# Altium PCB doamEsp.PcbDoc
Units mil, origin at the board's own origin, x right, y up, seen from the top; angles counter-clockwise.
Board outline 3325.07 x 2924.95 mil, 2 copper layers (Top Layer, Bottom Layer); 20 components, 19 nets, 88 pads, 0 vias.
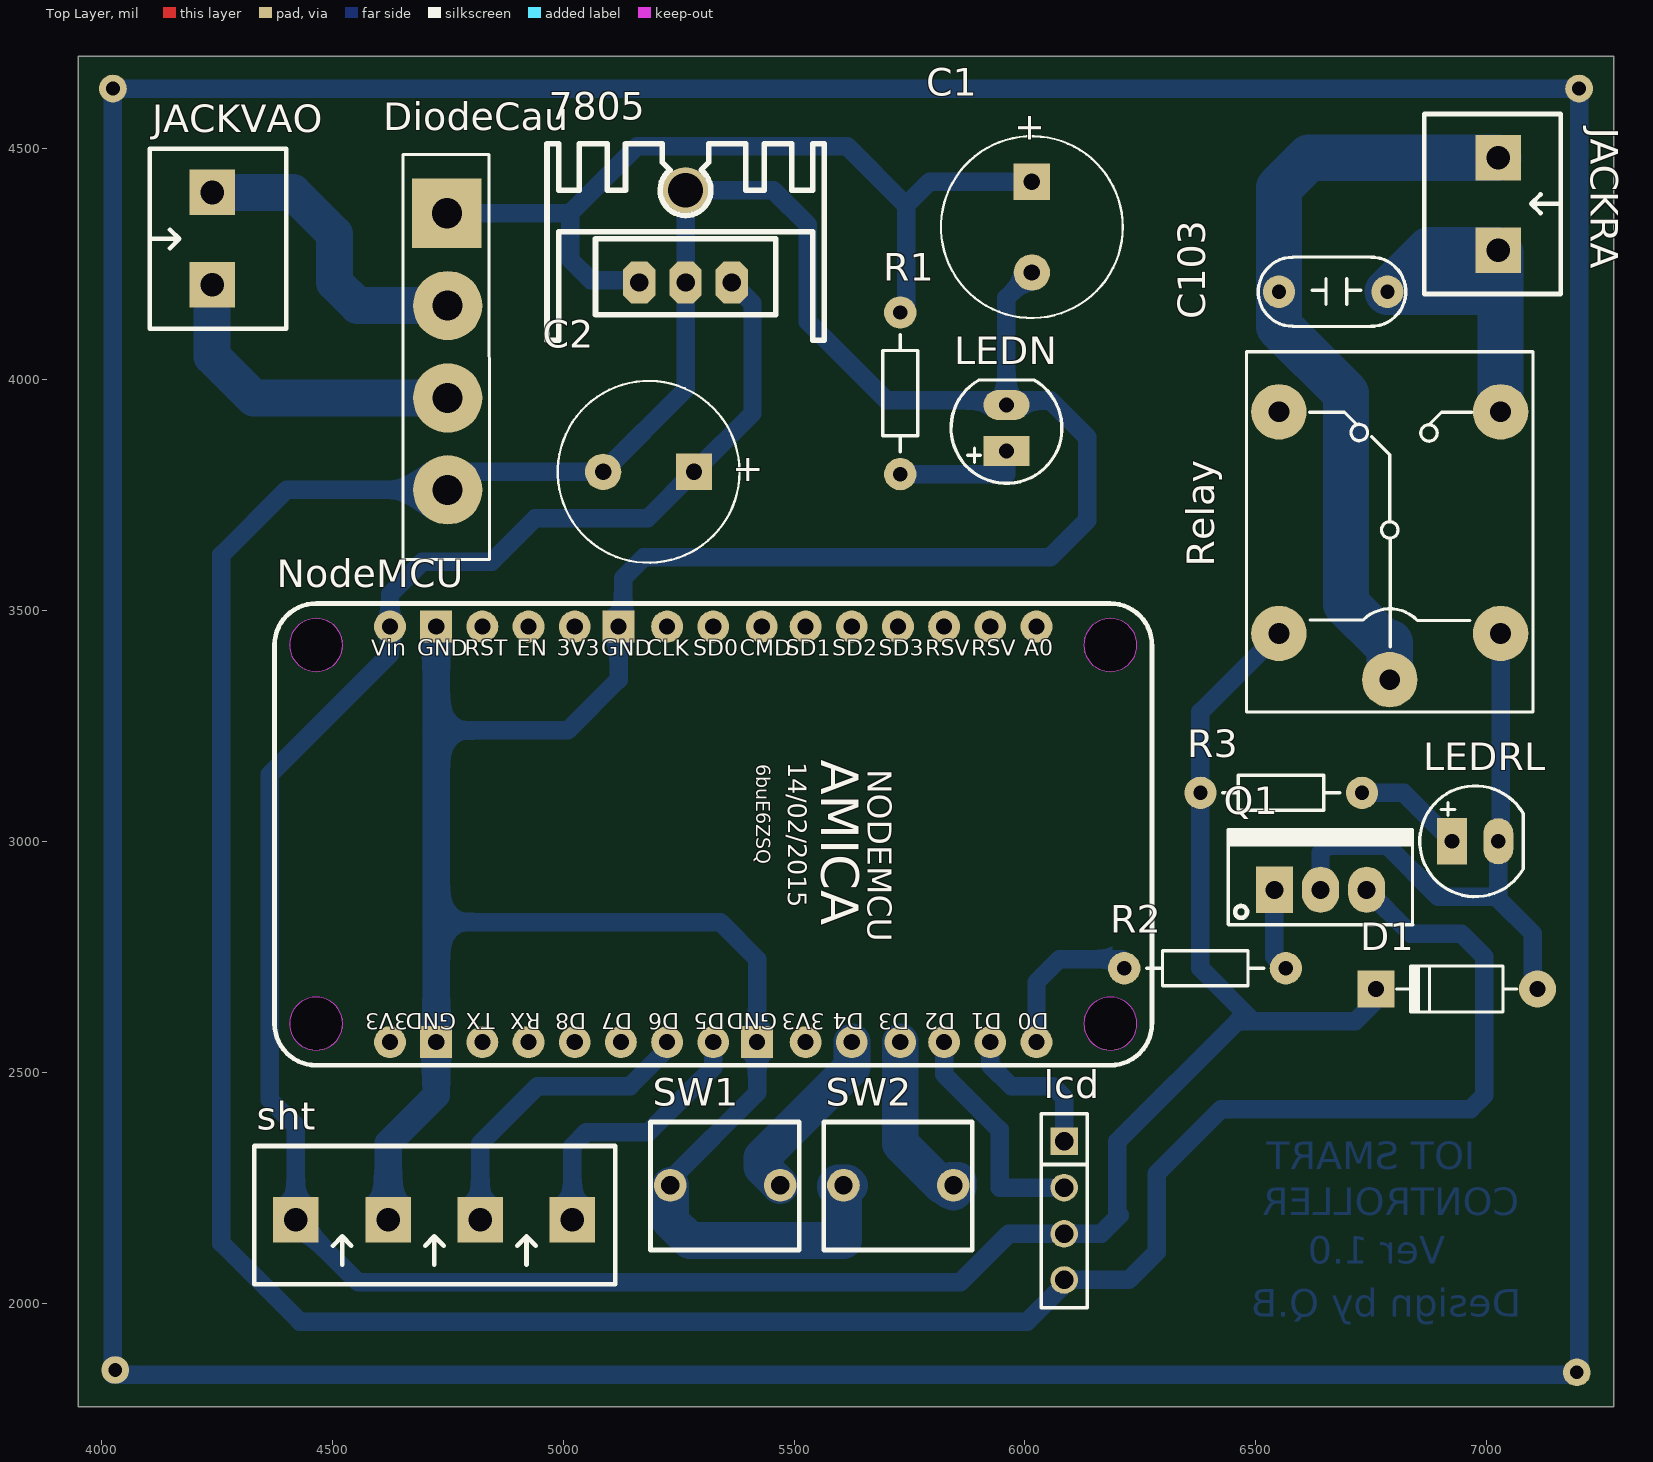
[diagram p0: Top Layer view]
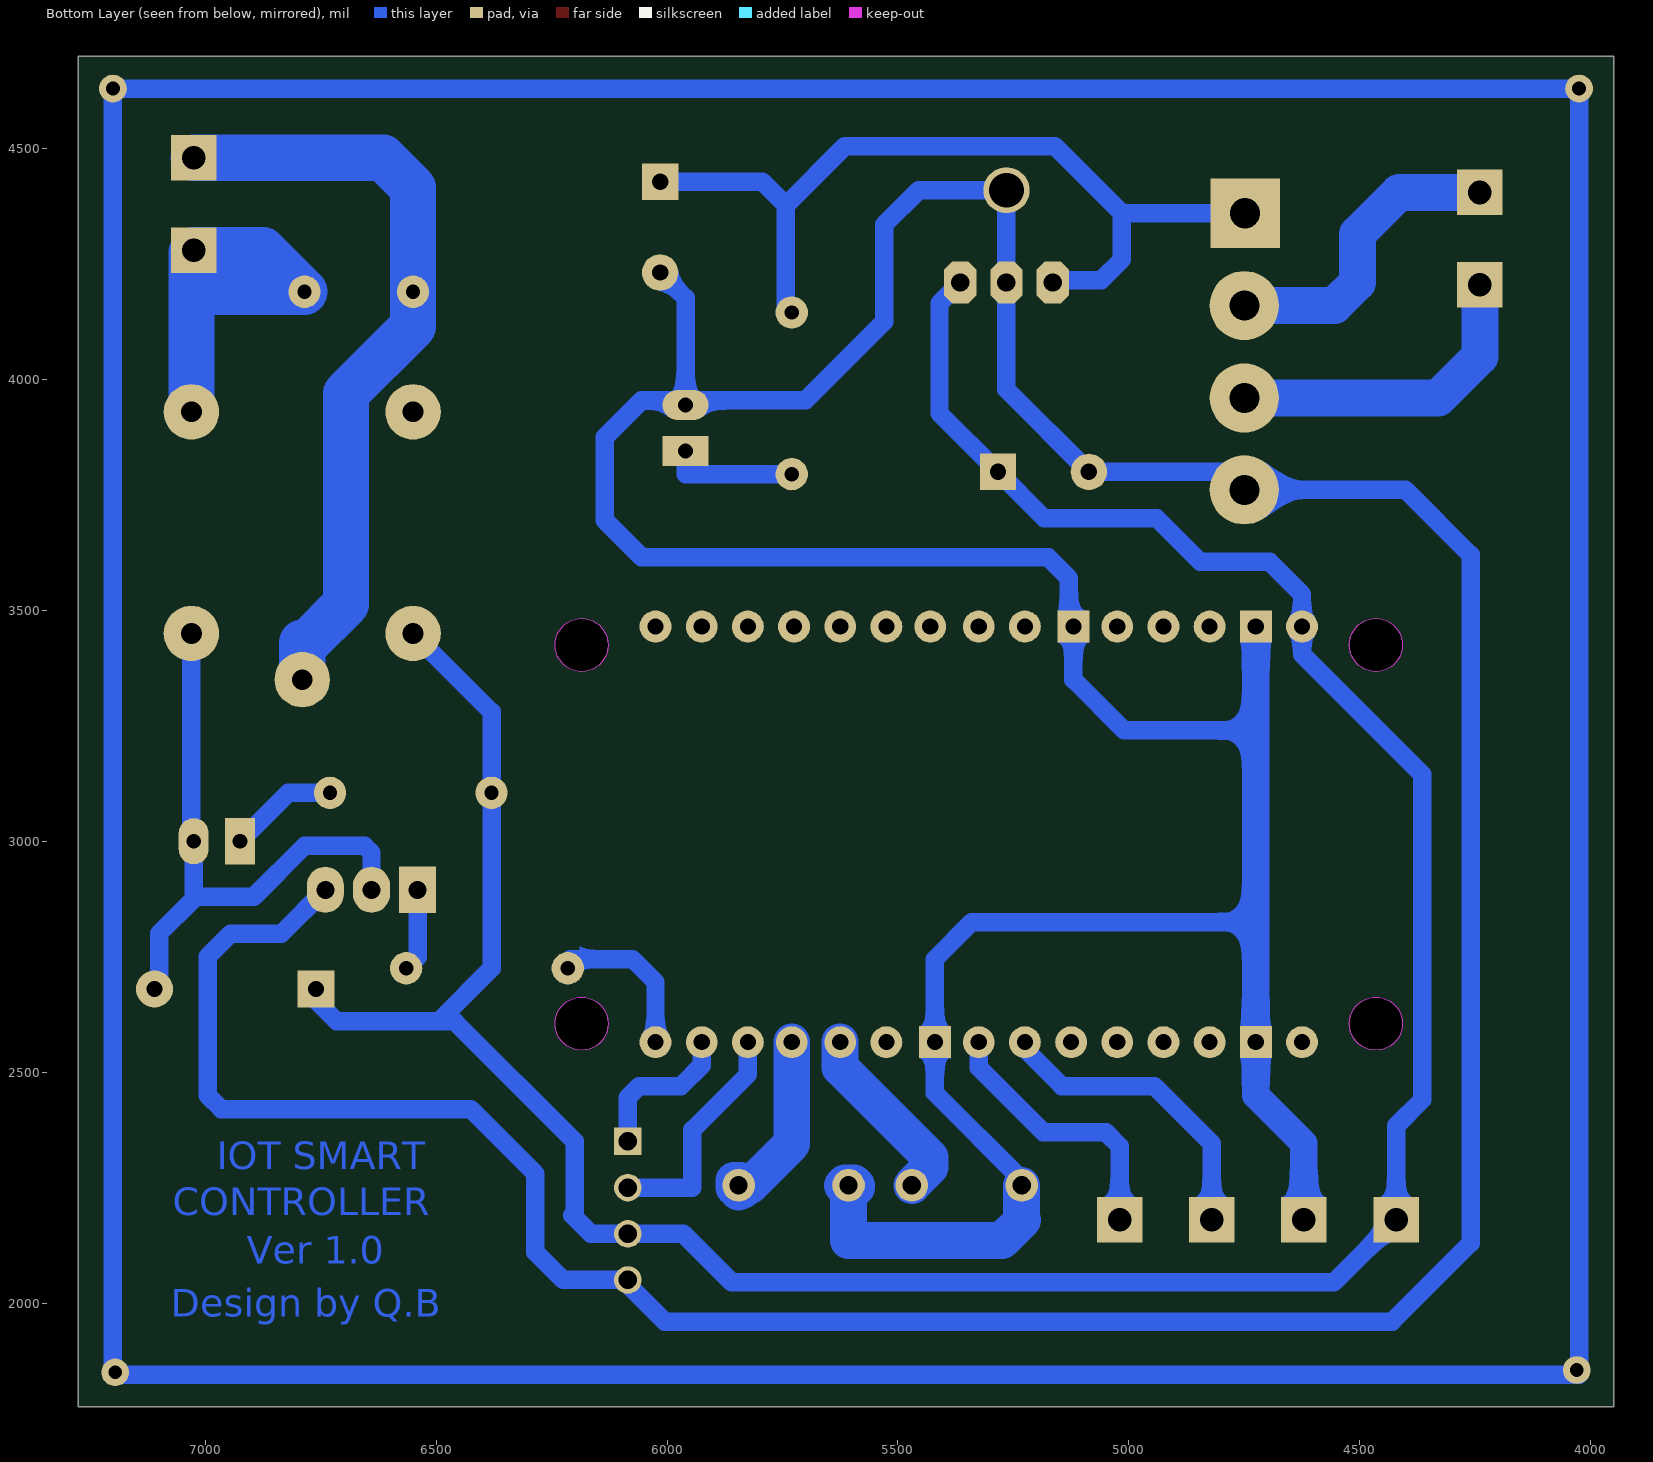
[diagram p1: Bottom Layer view, seen from below]
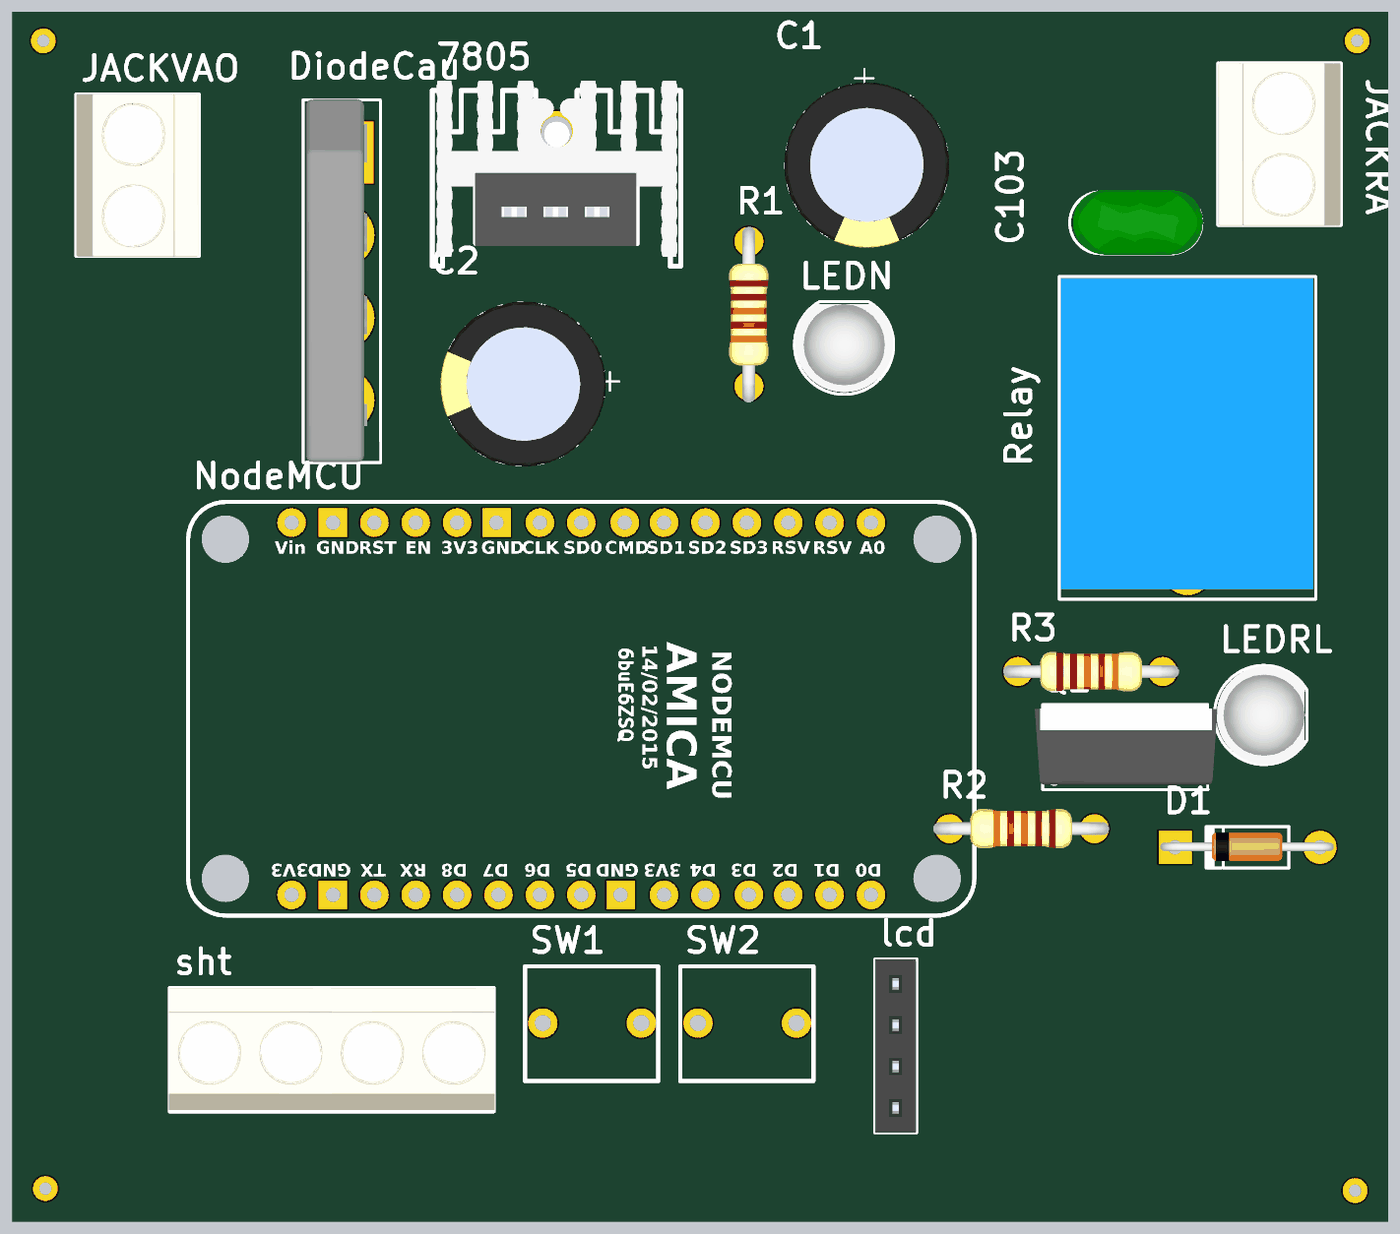
[diagram p2: 3D render of the assembled board from above, using the file's embedded part models]

## Layer stack, top to bottom
Top Solder: solder mask 0.4, Solder Resist, Dk 3.5
Top Layer: signal copper 1.4
Dielectric 1: dielectric 12.6, FR-4, Dk 4.8
Bottom Layer: signal copper 1.4
Bottom Solder: solder mask 0.4, Solder Resist, Dk 3.5

## Board outline
3949.94,1774.99 7275.01,1774.99 7275.01,4699.94 3949.94,4699.94

## Design rules (kind name [scope] priority, off if disabled: settings)
Clearance [All] p1: gap=10 ignorepadtopadclearanceinfootprint=FALSE except(0: Arc-Hole Track-Hole SMDPad-Hole THPad-Hole Via-Hole Fill-Hole Poly-Hole Region-Hole Text-Hole)
PolygonConnect [All] p1: connectstyle=Relief reliefconductorwidth=10 reliefentries=4 polygonreliefangle="90 Angle" airgapwidth=10
RoutingVias [All] p1: holewidth=28 width=50 viastyle="Through Hole" minholewidth=28 minwidth=50 maxholewidth=28 maxwidth=50
SolderMaskExpansion [All] p1: expansion=4
Width [All] p1: maxlimit=100 minlimit=40 preferedwidth=80
30 further rules are at their usual default settings.

## Components (designator, comment, footprint, x,y, rotation, side; value= is the part's Value field where it differs from the comment)
7805 "LM7805" QTO-220H3 5165,4210 r0 top
C1 "2200UF 16V" CA-ALU-10 6015,4330 r270 top value=104
C2 "2200UF 16V" CA-ALU-10 5185,3800 r180 top value=104
C103 "2KV" CN2.5 6675,4190 r180 top value=33pF
D1 "1N4007" D1A 7110,2680 r0 top
DiodeCau "Diode Brideg" "DIO-Bri 5A" 4750,4360 r270 top value="Cau 1A"
JACKRA "KF2" KF2-5.08 7025,4380 r270 top
JACKVAO "KF2" KF2-5.08 4240,4305 r90 top
lcd "JP4" JP4-C1T 6085,2350 r270 top
LEDN "LED" LED-5-RED 5960,3845 r90 top value="LED 3 ly Single Colour"
LEDRL "LED" LED-5-RED 6925,3000 r0 top value="LED 3 ly Single Colour"
NodeMCU "NodeMCU V1.0 ESP-12E" "NodeMCU V1.0 ESP-12E" 6271,3516 r270 top
Q1 "H1061" QTO-220 6540,2895 r0 top value=TIP41
R1 "1,2K" R1/4W 5730,3795 r90 top value="R1/4W - 1K"
R2 "1k" R1/4W 6215,2725 r0 top value="R1/4W - 1K"
R3 "1K" R1/4W 6730,3105 r180 top value="R1/4W - 1K"
Relay "5V" "RELAY 5" 6790,3675 r90 top value="Relay SPDT, 10A, 12V"
sht "KF4" KF4-5.08 4421,2180 r0 top (schematic designator SHT)
SW1 "SW" SW-2P-S 5470,2155 r180 top value="SW chip 2 pin"
SW2 "SW" SW-2P-S 5845,2155 r180 top value="SW chip 2 pin"

## Footprints (in the part's own frame and the unit in brackets; to place one, negate y for a bottom-side part, rotate by r counter-clockwise, add the part's x,y. Pads: shape width x height; smd on the part's side, far side on the other; paste and mask are expansions set on the pad)
CA-ALU-10 [mm] "Polarized capacitors, Aluminum Electrolytic Capacitors, 2-Leads, Body 10x20x5x0.6"
  rect 2x2 hole 0.9: 1(-2.5,0)
  round 2 hole 0.9: 2(2.5,0)
  silkscreen extent -5,-5 5,5, body extent -5.08,-5.08 5.08,5.08, height 20.52
CN2.5 [mil] "Tu pin to pin 250mil"
  round 70 hole 31: 1(-110,0) 2(125,0)
  silkscreen extent -150,-75 170,75, body extent -152,-80 162,77, height 539
D1A [mil] "Diode 1A, W 100mil, L 350mil"
  round 80 hole 35: 1(0,0)
  rect 80x80 hole 35: 2(-350,0)
  silkscreen extent -305,-50 -45,50, body extent -386,-33 34,36, height 84
"DIO-Bri 5A" [mil] "Brigde 5A"
  rect 150x150 hole 65: 1(0,-2)
  round 150 hole 65: 2(200,0) 3(400,0) 4(599,0)
  silkscreen extent -127,-97 750,90, body extent -129,-90 749,58, height 937
JP4-C1T [mm] "4 row, straight, gold plating"
  rect 1.52x1.52 hole 1.02: 1(0,0)
  round 1.52 hole 1.02: 2(2.54,0) 3(5.08,0) 4(7.62,0)
  silkscreen extent -1.52,-1.27 9.14,1.27, body extent -1.52,-1.25 9.14,1.25, height 8.51
KF2-5.08 [mm]
  rect 2.5x2.5 hole 1.3: 1(-2.54,0) 2(2.54,0)
  silkscreen extent -4.95,-4.08 4.95,3.43, body extent -5,-4.07 5,3.43, height 10
KF4-5.08 [mm]
  rect 2.5x2.5 hole 1.3: 1(0,0) 2(5.08,0) 3(10.147,0) 4(15.215,0)
  silkscreen extent -2.29,-3.53 17.58,4.06, body extent -2.36,-3.43 17.64,4.07, height 10
LED-5-RED [mil] "LED 2 PIN, 5 ly , Only colour,pin to pin 100mil"
  rect 65x100 hole 32: 1(0,0)
  oval 65x100 hole 32: 2(100,0)
  silkscreen extent -70,-120 154,120, body extent -65,-119 149,118, height 339
"NodeMCU V1.0 ESP-12E" [mil]
  round 115 hole 115 unplated paste-300 mask-300: 0(91,-86) 0(91,-1806) 0(911,-86) 0(911,-1806)
  round 69 hole 35: 3V3(51,-1246) 3V3(951,-746) 3V3(951,-1646) A0(51,-246) CLK(51,-1046) CMD(51,-841) D0(951,-246) D1(951,-346) D2(951,-446) D3(951,-541) D4(951,-646) D5(951,-946) D6(951,-1046) D7(951,-1146) D8(951,-1246) EN(51,-1346) RST(51,-1446) RSV(51,-346) RSV(51,-446) RX(951,-1346) SD0(51,-946) SD1(51,-746) SD2(51,-646) SD3(51,-546) TX(951,-1446) VIN(51,-1646)
  rect 69x69 hole 35: GND(51,-1151) GND(51,-1546) GND(951,-851) GND(951,-1546)
  Keep-Out Layer circle w2: c911,-1806 r57.5
  Keep-Out Layer circle w2: c91,-1806 r57.5
  Keep-Out Layer circle w2: c911,-86 r57.5
  Keep-Out Layer circle w2: c91,-86 r57.5
  silkscreen extent 1,-1896 1001,4
QTO-220 [mil] "TO-220 - 1-2-3"
  rect 80x100 hole 39: 1(0,0)
  oval 80x100 hole 39: 2(100,0) 3(200,0)
  silkscreen extent -100,-76 300,130, body extent -119,-64 322,121, height 755
QTO-220H3 [mil] "TO-220 1-2-3"
  oct 70x90 hole 40: 1(0,0) 2(100,0) 3(200,0)
  round 100 hole 75: 2(100,200)
  silkscreen extent -200,-125 400,300, body extent -190,-102 392,323, height 984
R1/4W [mil] "R 1/4W, 2 Pin, 350mil"
  round 70 hole 31: 1(0,0) 2(350,0)
  silkscreen extent 48,-38 302,38, body extent -40,-47 386,47, height 111
"RELAY 5" [mil] "Reley DPDT, 8 pin, 1A, W400mil, L800mil,H 300mil"
  round 120 hole 45: 1(-325,0) 2(255,240) 3(255,-240) 4(-225,-240) 5(-225,240)
  silkscreen extent -395,-310 385,310, body extent -371,-304 381,306, height 602
SW-2P-S [mm]
  round 1.8 hole 1: 1(0,-2.54) 2(6.045,-2.54)
  silkscreen extent -1.04,-6.02 7.14,1.02

## Part data
7805: "TO-220", Text Field1=70, Text Field2=30
C1 C2: library part CN-ALU-DIP, "Capacitor (Semiconductor SIM Model)", LatestRevisionDate=17-Jul-2002, LatestRevisionNote="Re-released for DXP Platform.", PackageReference=C1206, Publisher="Altium Limited"
C103: library part CN
D1: library part D1A, "Diode 1A"
DiodeCau: library part "DIODE BRIGDE", "Convert AC to DC voltage, 4 pin", ="Cau 5A"
JACKRA JACKVAO: Manufacturer="Würth Elektronik eiSos GmbH", partNo=691103110002, ComponentLink1 Description=Manufacturer, ComponentLink1URL=http://www.we-online.com, ComponentLink2 Description=Datasheet, ComponentLink2URL=http://katalog.we-online.de/em/datasheet/6911031100xx.pdf, Created by="Karrer Zheng", Created Date="29 October 2013", NoPins=2
lcd: "WR-PHD 2.54 mm Angled Socket Header", Manufacturer="Würth Elektronik eiSos GmbH", partNo=613004143121, ComponentLink1 Description=Manufacturer, ComponentLink1URL=http://www.we-online.com, ComponentLink2 Description=Datasheet, ComponentLink2URL=http://katalog.we-online.de/em/datasheet/6130xx143121.pdf, Created by="Karrer Zheng", Created Date="29 March 2013", NoPins=04
LEDN LEDRL: "LED Single colour Green and Red"
NodeMCU: "NodeMCU V1.0 ESP8266 (ESP-12E)"
Q1: library part NPN_BCE, "P 1W, BCE", =H1061
R1 R2 R3: library part R1/4W, "Resistor 1/4W"
Relay: library part "Relay 5", "Relay SPDT,10A - 12VDC 5 Pin", ="Relay SPDT, 10A, 24V"
sht: Manufacturer="Würth Elektronik eiSos GmbH", partNo=691133710004, ComponentLink1 Description=Manufacturer, ComponentLink1 URL=http://www.we-online.com, ComponentLink2 Description=Datasheet, ComponentLink2 URL=http://katalog.we-online.de/em/datasheet/6911337100xx.pdf, Created by="Baojun Chen", Created Date=4-Aug-15, NoPins=4
SW1 SW2: library part SW2, "Switch button 2 pin"

## Free pads (board coordinates)
  round 60 hole 30: 2(4030,1855) 4(4025,4630) 5(7200,4630) 6(7195,1850)

## Nets (pads, with @x,y where several pads share a name; then routed paths per layer and width w, separated by ;. In a path a pad name is that pad's centre, name@x,y a point inside that pad or via, vN(x,y) a via of type N, cw(c..) or ccw(c..) an arc to the next point about the centre after c; other vN are vias at no path point)
5v: 7805.3 C2.1 D1.2 lcd.3 NodeMCU.VIN R3.2 Relay.5 sht.1 | length 6466.6
  Bottom Layer w40: 7805.3 5410,4165 5410,3926.57 C2.1 5183.43,3700 4940,3700 4845,3605 4695,3605 4625,3535 NodeMCU.VIN 4625,3405 4365,3145 4365,2440 4421,2384 sht.1 4556,2045 5860,2045 5965,2150 lcd.3 6165,2150 6205,2190 6200,2195 6200,2350 6460,2610 6495,2610 ; Relay.5 6380,3280 R3.2 6380,2725 6495,2610 ; D1.2 6760,2655 6715,2610 6495,2610
B: Q1.1 R2.2 | length 180.4
  Bottom Layer w40: Q1.1 6540,2750 R2.2
E: 7805.2 C1.2 C2.2 DiodeCau.4 lcd.4 LEDN.2 NodeMCU.GND Q1.3 sht.2 SW1.2 SW2.2 | length 13505.4
  Bottom Layer w40: 4725,2825 5340,2825 5420,2745 5420,2565 5420,2455 5232,2267 SW1.2 ; 4725,3240 5010,3240 5120,3350 5120,3465 5130,3475 5130,3570 5175,3615 6055,3615 6135,3695 6135,3875 6055,3955 5970,3955 LEDN.2 ; C1.2 5960,4176.57 LEDN.2 ; Q1.3 6835,2800 6945,2800 6995,2750 6995,2450 6965,2420 6425,2420 6285,2280 6285,2110 6225,2050 lcd.4 6085,2040 6005,1960 4430,1960 4260,2130 4260,3620 4401,3761 DiodeCau.4 4789,3800 C2.2 5265,3978.43 5265,4210 5265,4410 5455,4410 5530,4335 5530,4125 5700,3955 5950,3955 LEDN.2
  Bottom Layer w60: sht.2 4621,2346 4725,2450 4725,2565 4725,2825 4725,3240 NodeMCU.GND@4725,3465
  Bottom Layer w80: SW1.2 5232,2182 5230,2180 5275,2135 5607,2135 SW2.2 5620,2255 5615,2260 5595,2260 5590,2255 SW2.2@5590,2250
giam: NodeMCU.D3 SW2.1 | length 443.5
  Bottom Layer w80: NodeMCU.D3 5730,2345 5820,2255 SW2.1@5835,2255 ; SW2.1@5835,2245 SW2.1@5835,2255 ; SW2.1 5845,2240 5855,2250 5855,2265 5840,2265 5835,2260 SW2.1@5835,2255
manu: NodeMCU.D8
Net7805_1: 7805.1 C1.1 DiodeCau.1 R1.2 | length 1909.4
  Bottom Layer w40: DiodeCau.1 5015,4360 ; 7805.1 5160,4215 5060,4215 5015,4260 5015,4360 ; R1.2 5742.5,4157.5 5742.5,4377.5 ; C1.1 5793.43,4428.43 5742.5,4377.5 ; 5015,4360 5160,4505 5615,4505 5742.5,4377.5
NetC103_1: C103.1 JACKRA.2 Relay.3 | length 882.6
  Bottom Layer w100: Relay.3 7030,4170 ; 7030,4170 7030,4275 JACKRA.2 6875,4280 C103.1 7010,4190 7030,4170
NetC103_2: C103.2 JACKRA.1 Relay.1 | length 1672.7
  Bottom Layer w100: Relay.1 6790,3430 6779.12,3430 6695,3514.12 6695,3970 6550,4115 C103.2 6550,4415 6615,4480 JACKRA.1
NetD1_1: D1.1 LEDRL.2 Q1.2 Relay.4 | length 1324.1
  Bottom Layer w40: Q1.2 6640,2975 6655,2990 6785,2990 6895,2880 7025,2880 ; Relay.4 7030,3005 LEDRL.2 7025,2880 ; D1.1 7100,2690 7100,2800 7025,2875 7025,2880
NetDiodeCau_2: DiodeCau.2 JACKVAO.2 | length 673
  Bottom Layer w80: JACKVAO.2 4415,4405 4505,4315 4505,4210 4555,4160 DiodeCau.2
NetDiodeCau_3: DiodeCau.3 JACKVAO.1 | length 723.5
  Bottom Layer w80: JACKVAO.1 4240,4050 4330,3960 DiodeCau.3
  Bottom Layer w100: DiodeCau.3@4735,3975 DiodeCau.3
NetLEDN_1: LEDN.1 R1.1 | length 280
  Bottom Layer w40: R1.1 5960,3795 LEDN.1
NetLEDRL_1: LEDRL.1 R3.1 | length 238.5
  Bottom Layer w40: R3.1 6820,3105 LEDRL.1
relay: NodeMCU.D0 R2.1 | length 335.7
  Bottom Layer w40: NodeMCU.D0 6025,2695 6075,2745 R2.1@6210,2745
SCL: lcd.1 NodeMCU.D1 | length 334
  Bottom Layer w40: NodeMCU.D1 5925,2515 5970,2470 6060,2470 6085,2445 lcd.1
SDA: lcd.2 NodeMCU.D2 | length 504.7
  Bottom Layer w40: NodeMCU.D2 5825,2495 5945,2375 5945,2250 lcd.2
tang: NodeMCU.D4 SW1.1 | length 407.3
  Bottom Layer w80: SW1.1 5430,2295 5430,2315 5625,2510 NodeMCU.D4
vang: NodeMCU.D5 sht.4 | length 590.4
  Bottom Layer w40: sht.4 5020,2340 5050,2370 5185,2370 5325,2510 NodeMCU.D5
xanh: NodeMCU.D6 sht.3 | length 669.7
  Bottom Layer w40: sht.3 4820.5,2345.5 4945,2470 5145,2470 5225,2550 NodeMCU.D6
pads on no net: NodeMCU.0 NodeMCU.3V3 NodeMCU.A0 NodeMCU.CLK NodeMCU.CMD NodeMCU.D7 NodeMCU.EN NodeMCU.RST NodeMCU.RSV NodeMCU.RX NodeMCU.SD0 NodeMCU.SD1 NodeMCU.SD2 NodeMCU.SD3 NodeMCU.TX Relay.2
copper on no net: | length 11920
  Bottom Layer w40: 4025,1845 7200,1845 7200,4630 4025,4630 4025,1845

## Other copper
Bottom Layer:
  text "IOT SMART" at 6975,2290 h60
  text "CONTROLLER" at 7070,2190 h60
  text "Ver 1.0" at 6910,2085 h60
  text "Design by Q.B" at 7075,1970 h60

## Text inside footprints (layer, text, board x,y; h text height)
C1: Top Overlay "+" at 5985.98,4579.02 h59.06 r270
C2: Top Overlay "+" at 5434.02,3829.02 h59.06 r180
NodeMCU: Top Overlay "14/02/2015" at 5473,3171 h69 r270; Top Overlay "AMICA" at 5532,3177 h140 r270; Top Overlay "NODEMCU" at 5642,3156 h90 r270; Top Overlay "6buE6ZSQ" at 5418,3167 h30 r270; Top Overlay "CLK" at 5181,3390 h60; Top Overlay "SD0" at 5281.43,3390 h60; Top Overlay "SD1" at 5482.29,3390 h60; Top Overlay "SD2" at 5582.71,3390 h60; Top Overlay "SD3" at 5683.14,3390 h60; Top Overlay "RSV" at 5783.57,3390 h60; Top Overlay "RSV" at 5884,3390 h60; Top Overlay "A0" at 5998,3390 h60; Top Overlay "D5" at 5350,2640 h60 r180; Top Overlay "GND" at 5464,2640 h60 r180; Top Overlay "3V3" at 5565.99,2640 h60 r180; Top Overlay "D4" at 5651,2640 h60 r180; Top Overlay "D3" at 5749.42,2640 h60 r180; Top Overlay "D2" at 5849.42,2640 h60 r180; Top Overlay "D1" at 5949.65,2640 h60 r180; Top Overlay "D0" at 6051,2640 h60 r180; Top Overlay "CMD" at 5381.86,3390 h60; Top Overlay "D6" at 5250.88,2640 h60 r180; Top Overlay "3V3" at 4665,2640 h60 r180; Top Overlay "GND" at 4768.8,2640 h60 r180; Top Overlay "TX" at 4852,2640 h60 r180; Top Overlay "RX" at 4950.94,2640 h60 r180; Top Overlay "D8" at 5049.89,2640 h60 r180; Top Overlay "D7" at 5149.77,2640 h60 r180; Top Overlay "Vin" at 4584,3390 h60; Top Overlay "GND" at 4684,3390 h60; Top Overlay "RST" at 4787,3390 h60; Top Overlay "EN" at 4899,3390 h60; Top Overlay "3V3" at 4986,3390 h60; Top Overlay "GND" at 5083,3390 h60